# EAGLE board PCB (EAGLE 9.7.0)
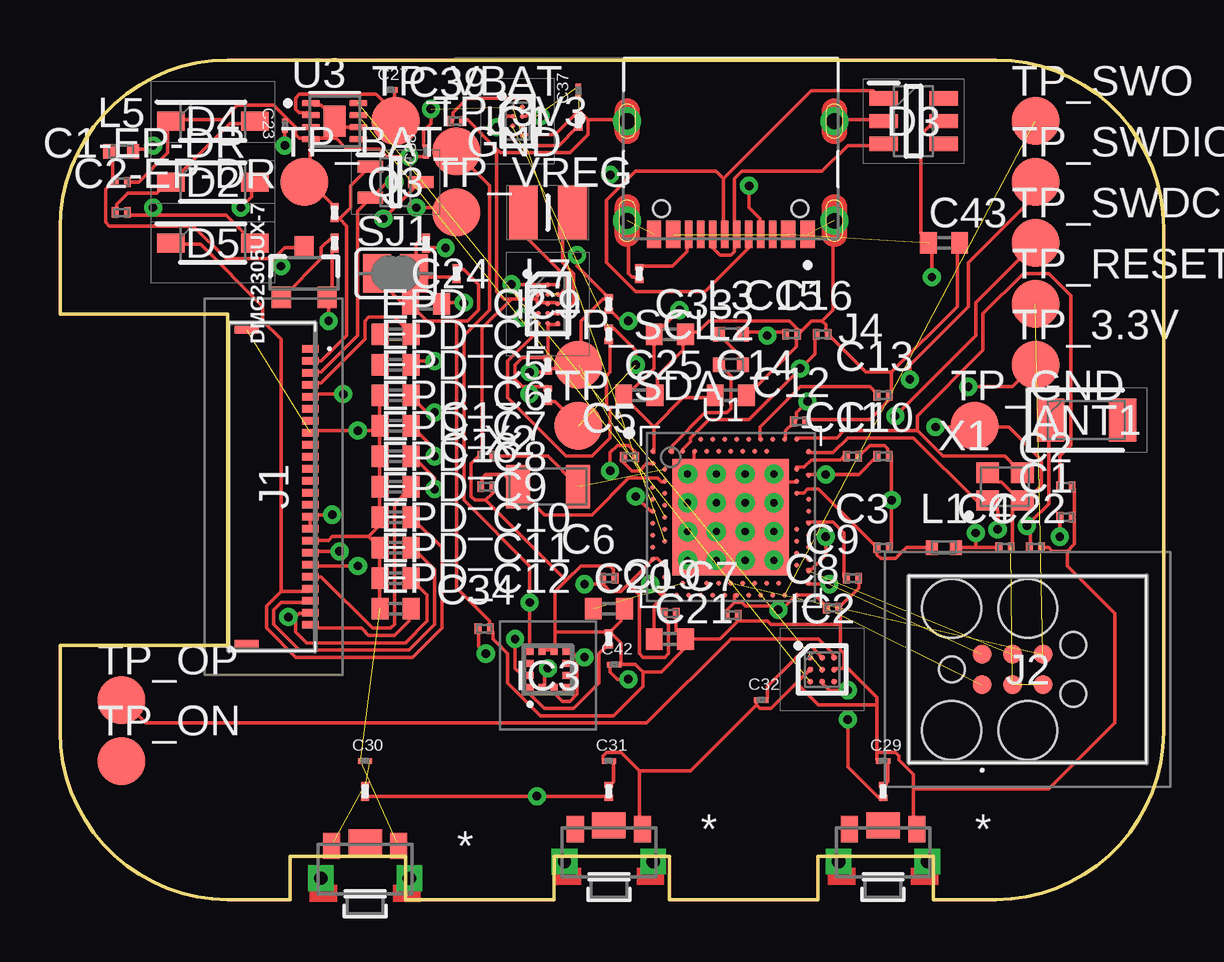
[diagram p0: board, top side]
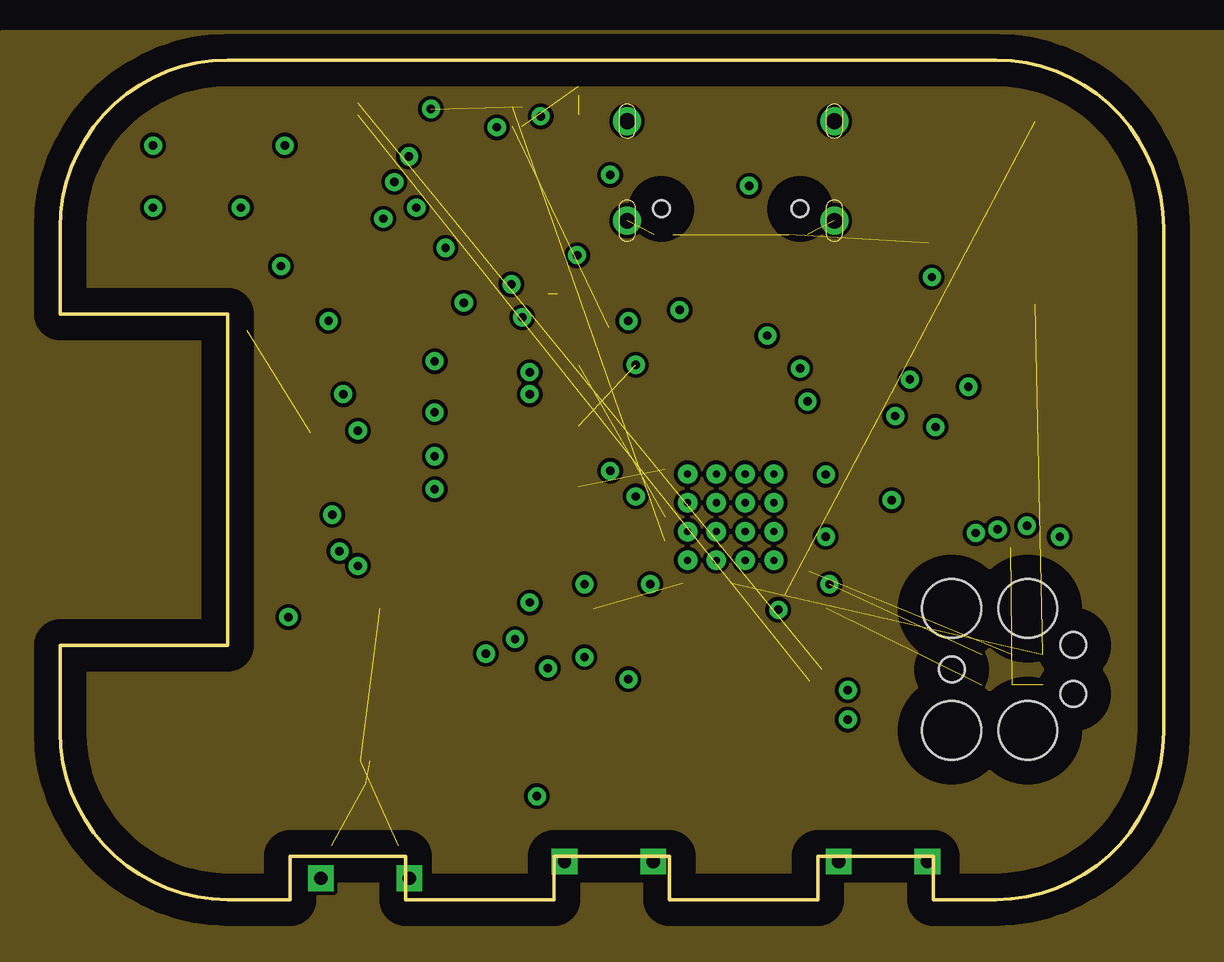
[diagram p1: board, inner layer Route2]
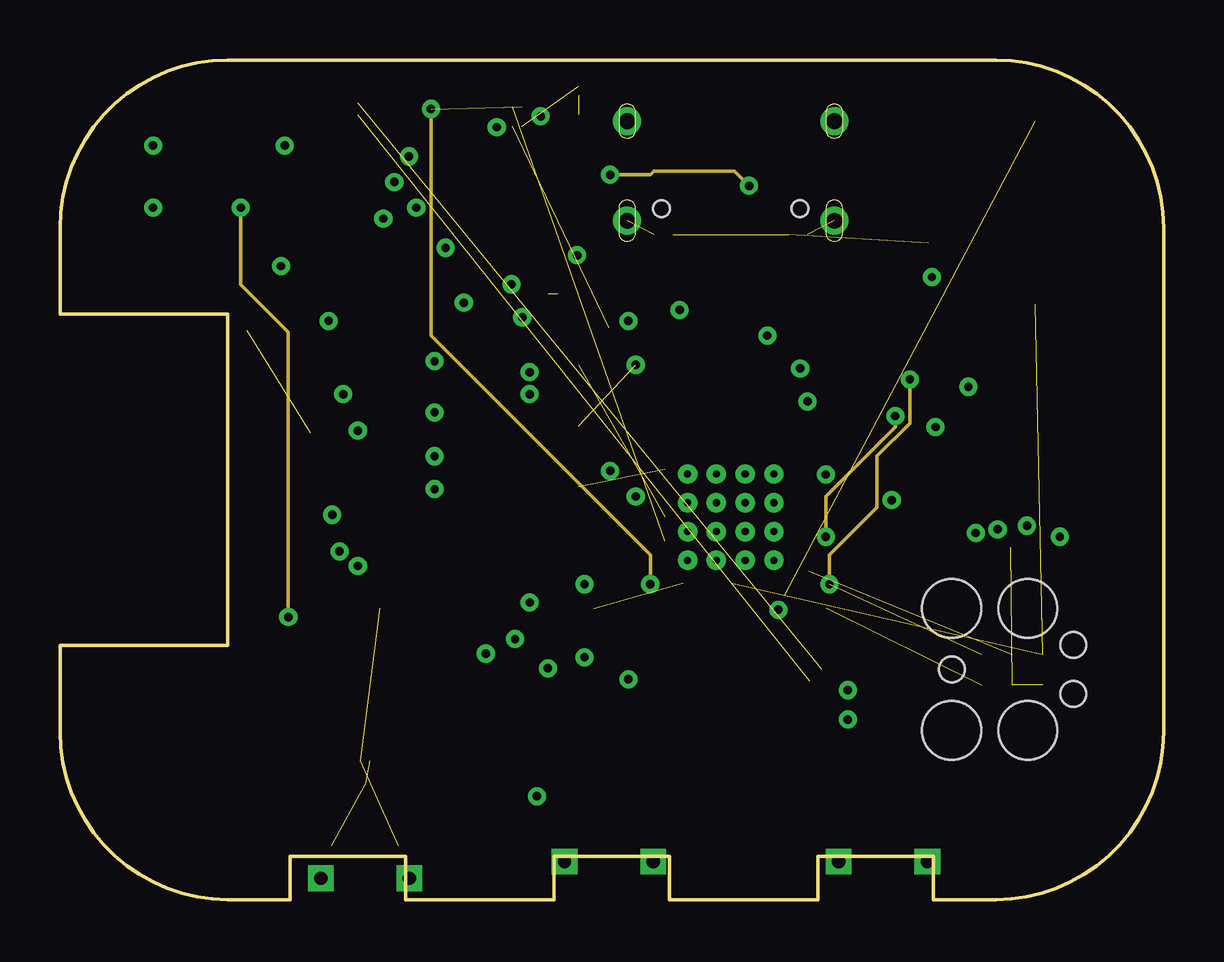
[diagram p2: board, inner layer Route15]
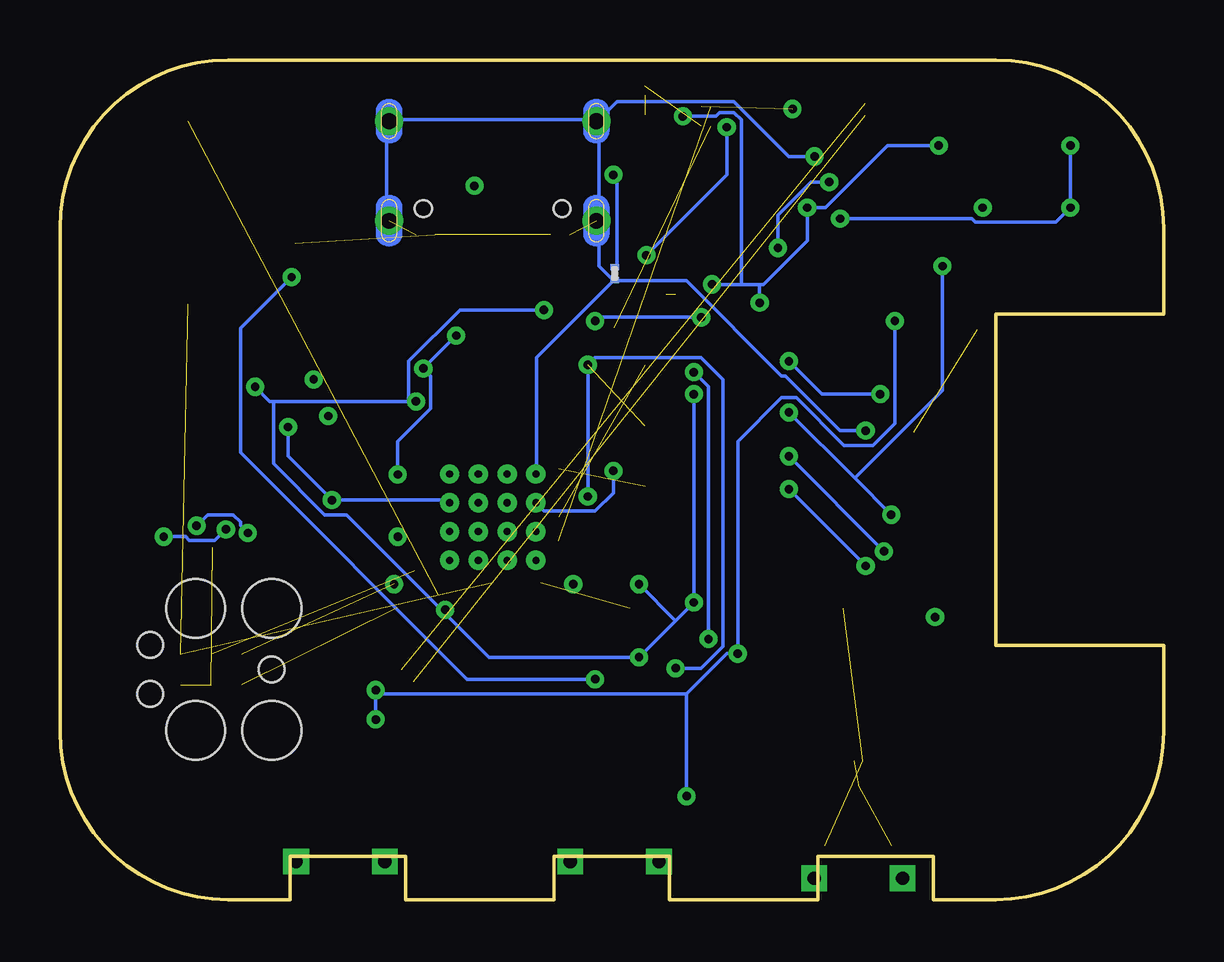
[diagram p3: board, bottom side, seen from below]

Size 46 x 35 mm. Coordinates in mm from the lower left corner, seen from the top.
Outline: 39,0 36.4,0 36.4,1.8 31.6,1.8 31.6,0 25.4,0 25.4,1.8 20.6,1.8 20.6,0 14.4,0 14.4,1.8 9.6,1.8 9.6,0 7,0 arc-90 0,7 0,10.6 7,10.6 7,24.4 0,24.4 0,28 arc-90 7,35 39,35 arc-90 46,28 46,7 arc-90 39,0
Copper layers (1+2*15+16): Top 0.035mm / dielectric 1.5mm / Route2 0.035mm / dielectric 0.15mm / Route15 0.035mm / dielectric 0.2mm / Bottom 0.035mm
Design rules "Fusion Electronics Design Rules *": minimum track width 6mil, minimum drill 0.35mm, track to track 6mil, track to pad 6mil, pad to pad 6mil, via to via 6mil, smd to smd 6mil, copper to edge 40mil, drill to drill 6mil, minimum pad ring 10mil, minimum via ring 8mil, stop-mask expansion 4mil, vias tented up to drill 9999mil, thermal gap 10mil

## Footprints (pad centres in the part's own frame; a part is rotated, then mirrored left to right if it is on the bottom)
2450AT18B100E_ANTC3216X140N = smd 1.15 x 1.8: 1 -1.5,0; 2 1.5,0
NORDIC_NRF_3_RESC0201_L = smd 0.28 x 0.43: 1 -0.255,0; 2 0.255,0
ESP32_C6_LIBRARY_1_ESP32_WROVER_EAGLE-LTSPICE_C0402 = smd 0.7 x 0.9: 1 -0.65,0; 2 0.65,0
GRM011R60J152KE01L_2_CAPC0201X13N = smd 0.22 x 0.23: 1 -0.185,0; 2 0.185,0
ESP32_C6_LIBRARY_5_SOD3716X135N = smd 1.15 x 0.8: 1 -1.75,0; 2 1.75,0
ESP32_C6_LIBRARY_3_SOT95P280X145-6N = smd 1.2 x 0.6: 1 -1.25,0.95; 2 -1.25,0; 3 -1.25,-0.95; 4 1.25,-0.95; 5 1.25,0; 6 1.25,0.95
ESP32_C6_LIBRARY_4_ESP32_C6_LIBRARY_4_ESP32_C6_LIBRARY_4_ESP32_C6_LIBRARY_4_ESP32_WROVER_SPARKFUN-DISCRETESEMI_SOT23-3 = smd 0.8 x 0.9: 1 -0.95,-1; 2 0.95,-1; 3 0,1.1
BQ25180YBGR_BGA8C40P2X4_100X155X50 = smd 0.2 x 0.2: A1 -0.2,0.6; A2 0.2,0.6; B1 -0.2,0.2; B2 0.2,0.2; C1 -0.2,-0.2; C2 0.2,-0.2; D1 -0.2,-0.6; D2 0.2,-0.6
DRV2605YZFR_BGA9C50P3X3_144X144X62 = smd 0.25 x 0.25: A1 -0.5,0.5; A2 0,0.5; A3 0.5,0.5; B1 -0.5,0; B2 0,0; B3 0.5,0; C1 -0.5,-0.5; C2 0,-0.5; C3 0.5,-0.5
BMA423_BMA423 = smd 0.3 x 0.35: 1 -0.75,-0.775; 2 -0.25,-0.775; 3 0.25,-0.775; 4 0.75,-0.775; 7 0.75,0.775; 8 0.25,0.775; 9 -0.25,0.775; 10 -0.75,0.775 | smd 0.35 x 0.3: 5 0.775,-0.25; 6 0.775,0.25; 11 -0.775,0.25; 12 -0.775,-0.25
RT6160AWSC_BGA15C40P3X5_140X230X60 = smd 0.216 x 0.216: A1 -0.4,0.8; A2 0,0.8; A3 0.4,0.8; B1 -0.4,0.4; B2 0,0.4; B3 0.4,0.4; C1 -0.4,0; C2 0,0; C3 0.4,0; D1 -0.4,-0.4; D2 0,-0.4; D3 0.4,-0.4; E1 -0.4,-0.8; E2 0,-0.8; E3 0.4,-0.8
503480-2400_5034802400 = smd 0.3 x 0.7: 1 -5.75,1.525; 2 -5.25,1.525; 3 -4.75,1.525; 4 -4.25,1.525; 5 -3.75,1.525; 6 -3.25,1.525; 7 -2.75,1.525; 8 -2.25,1.525; 9 -1.75,1.525; 10 -1.25,1.525; 11 -0.75,1.525; 12 -0.25,1.525; 13 0.25,1.525; 14 0.75,1.525; 15 1.25,1.525; 16 1.75,1.525; 17 2.25,1.525; 18 2.75,1.525; 19 3.25,1.525; 20 3.75,1.525; 21 4.25,1.525; 22 4.75,1.525; 23 5.25,1.525; 24 5.75,1.525 | smd 0.3 x 1: MP1 -6.54,-1.125; MP2 6.54,-1.125
TC2030-IDC_TC2030IDC = smd 0.783 x 0.783: 1 -0.953,-0.635; 2 -0.953,0.635; 3 0.317,-0.635; 4 0.317,0.635; 5 1.588,-0.635; 6 1.588,0.635 | hole 2.451: -2.223,-2.54; -2.223,2.54; 0.952,-2.54; 0.952,2.54 | hole 1.067: -2.223,0; 2.857,-1.016; 2.857,1.016
KH-TYPE-C-16P_KINGHELM_KH-TYPE-C-16P = smd 0.6 x 1.15: A1_B12 -3.2,4.725; A4_B9 -2.4,4.725; A9_B4 2.4,4.725; A12_B1 3.2,4.725 | smd 0.3 x 1.15: A5 -1.25,4.725; A6 -0.25,4.725; A7 0.25,4.725; A8 1.25,4.725; B5 1.75,4.725; B6 0.75,4.725; B7 -0.75,4.725; B8 -1.75,4.725 | drill 0.65 pad 1.05: SH1 -4.32,0; SH2 4.32,0; SH3 -4.32,4.15; SH4 4.32,4.15 | hole 0.7: -2.89,3.65; 2.89,3.65
NORDIC_NRF_2_RESC0402_L = smd 0.5 x 0.6: 1 -0.5,0; 2 0.5,0
MLP2016SR47MT0S1_INDC2016X100N = smd 1.2 x 2.2: 1 -1.028,0; 2 1.028,0
ESP32_C6_LIBRARY_6_SOT65P210X110-3N = smd 1.05 x 0.5: 1 -1.05,0.65; 2 -1.05,-0.65; 3 1.05,0
ERA-1AEB3401C_0201 = smd 0.35 x 0.25: 1 0,0.275; 2 0,-0.275
CPF0201D7K68C1_0201 = smd 0.35 x 0.25: 1 0,0.275; 2 0,-0.275
ESP32_C6_LIBRARY_7_JUMPER_SJ = smd 1.168 x 1.6: 1 -0.762,0; 2 0.762,0
2025-10-22_07-23-44_LIBRARY_SW_EVP-AKE31A_PAN = smd 0.711 x 1.092: 1 -1.4,-0.972; 2 1.4,-0.972 | drill 0.559 pad 0.914 square: 3 -1.848,0.381; 4 1.848,0.381 | smd 1.397 x 1.092: 5 0,-1.124
HECTOR_WATCH_1_TP20R = smd 2 x 2: TP 0,0
NORDIC_NRF_4_AQFN50P700X700X85_HS-74N = smd 4.85 x 4.85: P$74 0,0 | drill 0.3 pad 0.6: P$75 -1.8,1.8; P$76 -0.6,1.8; P$77 0.6,1.8; P$78 1.8,1.8; P$79 -1.8,0.6; P$80 -0.6,0.6; P$81 0.6,0.6; P$82 1.8,0.6; P$83 -1.8,-0.6; P$84 -0.6,-0.6; P$85 0.6,-0.6; P$86 1.8,-0.6; P$87 -1.8,-1.8; P$88 -0.6,-1.8; P$89 0.6,-1.8; P$90 1.8,-1.8 | smd 0.2 x 0.2: P$A8 -1.25,3.25; P$A10 -0.75,3.25; P$A12 -0.25,3.25; P$A14 0.25,3.25; P$A16 0.75,3.25; P$A18 1.25,3.25; P$A20 1.75,3.25; P$A22 2.25,3.25; P$A23 2.75,3.25; P$AA24 3.25,-2.25; P$AB2 -2.75,-2.5; P$AC5 -2,-2.75; P$AC9 -1,-2.75; P$AC11 -0.5,-2.75; P$AC13 0,-2.75; P$AC15 0.5,-2.75; P$AC17 1,-2.75; P$AC19 1.5,-2.75; P$AC21 2,-2.75; P$AC24 3.25,-2.75; P$AD2 -2.75,-3.25; P$AD4 -2.25,-3.25; P$AD6 -1.75,-3.25; P$AD8 -1.25,-3.25; P$AD10 -0.75,-3.25; P$AD12 -0.25,-3.25; P$AD14 0.25,-3.25; P$AD16 0.75,-3.25; P$AD18 1.25,-3.25; P$AD20 1.75,-3.25; P$AD22 2.25,-3.25; P$AD23 2.75,-3.25; P$B1 -3.25,2.75; P$B3 -2.5,2.75; P$B5 -2,2.75; P$B7 -1.5,2.75; P$B9 -1,2.75; P$B11 -0.5,2.75; P$B13 0,2.75; P$B15 0.5,2.75; P$B17 1,2.75; P$B19 1.5,2.75; P$B24 3.25,2.75; P$C1 -3.25,2.25; P$D2 -2.75,2; P$D23 2.75,2; P$E24 3.25,1.75; P$F2 -2.75,1.5; P$F23 2.75,1.5; P$G1 -3.25,1.25; P$H2 -2.75,1; P$H23 2.75,1; P$J1 -3.25,0.75; P$J24 3.25,0.75; P$K2 -2.75,0.5; P$L1 -3.25,0.25; P$L24 3.25,0.25; P$M2 -2.75,0; P$N1 -3.25,-0.25; P$N24 3.25,-0.25; P$P2 -2.75,-0.5; P$P23 2.75,-0.5; P$R1 -3.25,-0.75; P$R24 3.25,-0.75; P$T2 -2.75,-1; P$T23 2.75,-1; P$U1 -3.25,-1.25; P$U24 3.25,-1.25; P$V23 2.75,-1.5; P$W1 -3.25,-1.75; P$W24 3.25,-1.75; P$Y2 -2.75,-2; P$Y23 2.75,-2
ESP32_C6_LIBRARY_SON50P200X200X80-9N = smd 0.76 x 0.27: 1 -0.985,0.75; 2 -0.985,0.25; 3 -0.985,-0.25; 4 -0.985,-0.75; 5 0.985,-0.75; 6 0.985,-0.25; 7 0.985,0.25; 8 0.985,0.75 | smd 0.9 x 1.3: 9 0,0
NORDIC_NRF_BT-XTAL_2016_N = smd 0.95 x 0.85: 1 -0.725,-0.575; 2 0.725,-0.575; 3 0.725,0.575; 4 -0.725,0.575
NORDIC_NRF_1_XTAL_3215_N = smd 1 x 1.8: 1 -1.25,0; 2 1.25,0

## Placement (x,y rotation side)
ANT1  2450AT18B100E  [2450AT18B100E_ANTC3216X140N]  42.79,19.99 0 top
C1  12pF  [NORDIC_NRF_3_RESC0201_L]  41.93,15.94 0 top
C1-EP-DR  10uF  [NORDIC_NRF_3_RESC0201_L]  2.56,29.91 0 top
C2  12pF  [NORDIC_NRF_3_RESC0201_L]  41.93,17.21 0 top
C2-EP-DR  4.7uF/25V  [NORDIC_NRF_3_RESC0201_L]  2.56,28.64 0 top
C3  1pF  [NORDIC_NRF_3_RESC0201_L]  34.31,14.67 0 top
C4  1pF  [NORDIC_NRF_3_RESC0201_L]  39.39,14.67 0 top
C5  100nF  [NORDIC_NRF_3_RESC0201_L]  23.75,18.45 0 top
C6  4.7µF  [NORDIC_NRF_3_RESC0201_L]  22.88,13.4 0 top
C7  100nF  [NORDIC_NRF_3_RESC0201_L]  28.02,11.85 0 top
C8  100nF  [NORDIC_NRF_3_RESC0201_L]  32.2,12.15 0 top
C9  820pF  [NORDIC_NRF_3_RESC0201_L]  33.04,13.4 0 top
C10  N.C.  [NORDIC_NRF_3_RESC0201_L]  34.31,18.48 0 top
C11  100pF  [NORDIC_NRF_3_RESC0201_L]  33.04,18.48 0 top
C12  100nF  [NORDIC_NRF_3_RESC0201_L]  30.83,19.93 0 top
C13  N.C.  [NORDIC_NRF_3_RESC0201_L]  34.31,21.02 0 top
C14  4.7µF  [ESP32_C6_LIBRARY_1_ESP32_WROVER_EAGLE-LTSPICE_C0402]  27.96,21.02 0 top
C15  1.0µF  [NORDIC_NRF_3_RESC0201_L]  30.5,23.56 0 top
C16  47nF  [NORDIC_NRF_3_RESC0201_L]  31.77,23.56 0 top
C17  12pF  [NORDIC_NRF_3_RESC0201_L]  17.8,18.48 0 top
C18  12pF  [NORDIC_NRF_3_RESC0201_L]  17.8,17.21 0 top
C19  100nF  [NORDIC_NRF_3_RESC0201_L]  25.43,11.93 0 top
C20  4.7µF  [ESP32_C6_LIBRARY_1_ESP32_WROVER_EAGLE-LTSPICE_C0402]  22.88,12.13 0 top
C21  4.7µF  [ESP32_C6_LIBRARY_1_ESP32_WROVER_EAGLE-LTSPICE_C0402]  25.42,10.86 0 top
C22  N.C.  [NORDIC_NRF_3_RESC0201_L]  40.66,14.67 0 top
C23  0.1uF  [GRM011R60J152KE01L_2_CAPC0201X13N]  9.37,32.27 90.7 top
C24  10uF  [ESP32_C6_LIBRARY_1_ESP32_WROVER_EAGLE-LTSPICE_C0402]  15.26,24.83 0 top
C25  22uF  [ESP32_C6_LIBRARY_1_ESP32_WROVER_EAGLE-LTSPICE_C0402]  24.15,21.02 0 top
C27  0.1uF  [GRM011R60J152KE01L_2_CAPC0201X13N]  13.78,33.75 0 top
C29  1uF  [GRM011R60J152KE01L_2_CAPC0201X13N]  34.31,5.78 0 top
C30  1uF  [GRM011R60J152KE01L_2_CAPC0201X13N]  12.72,5.78 0 top
C31  1uF  [GRM011R60J152KE01L_2_CAPC0201X13N]  22.88,5.78 0 top
C32  1uF  [GRM011R60J152KE01L_2_CAPC0201X13N]  29.23,8.32 0 top
C33  22uF  [ESP32_C6_LIBRARY_1_ESP32_WROVER_EAGLE-LTSPICE_C0402]  25.42,23.56 0 top
C34  0.1uF  [NORDIC_NRF_3_RESC0201_L]  17.69,11.29 0 top
C37  1uF  [GRM011R60J152KE01L_2_CAPC0201X13N]  21.61,33.72 90 top
C38  1uF  [GRM011R60J152KE01L_2_CAPC0201X13N]  15.26,31.18 90 top
C39  10uF  [NORDIC_NRF_3_RESC0201_L]  16.53,32.45 0 top
C42  0.1uF  [GRM011R60J152KE01L_2_CAPC0201X13N]  23.1,9.8 0 top
C43  4.7uF  [ESP32_C6_LIBRARY_1_ESP32_WROVER_EAGLE-LTSPICE_C0402]  36.85,27.37 0 top
D2  ESP32_C6_LIBRARY_5_MBR0530  [ESP32_C6_LIBRARY_5_SOD3716X135N]  6.37,29.91 0 top
D3  USBLC6-2SC6Y  [ESP32_C6_LIBRARY_3_SOT95P280X145-6N]  35.58,32.45 0 top
D4  ESP32_C6_LIBRARY_5_MBR0530  [ESP32_C6_LIBRARY_5_SOD3716X135N]  6.37,32.45 0 top
D5  ESP32_C6_LIBRARY_5_MBR0530  [ESP32_C6_LIBRARY_5_SOD3716X135N]  6.37,27.37 0 top
DMG2305UX-7  20V/4.2A/52mΩ/1.4W  [ESP32_C6_LIBRARY_4_ESP32_C6_LIBRARY_4_ESP32_C6_LIBRARY_4_ESP32_C6_LIBRARY_4_ESP32_WROVER_SPARKFUN-DISCRETESEMI_SOT23-3]  10.18,26.1 0 top
EPD_C1  1uF/50V  [ESP32_C6_LIBRARY_1_ESP32_WROVER_EAGLE-LTSPICE_C0402]  13.99,22.29 0 top
EPD_C2  1uF/50V  [ESP32_C6_LIBRARY_1_ESP32_WROVER_EAGLE-LTSPICE_C0402]  13.99,23.56 0 top
EPD_C5  0.1uF/50V  [ESP32_C6_LIBRARY_1_ESP32_WROVER_EAGLE-LTSPICE_C0402]  13.99,21.02 0 top
EPD_C6  1uF/50V  [ESP32_C6_LIBRARY_1_ESP32_WROVER_EAGLE-LTSPICE_C0402]  13.99,19.75 0 top
EPD_C7  1uF/50V  [ESP32_C6_LIBRARY_1_ESP32_WROVER_EAGLE-LTSPICE_C0402]  13.99,18.48 0 top
EPD_C8  1uF/50V  [ESP32_C6_LIBRARY_1_ESP32_WROVER_EAGLE-LTSPICE_C0402]  13.99,17.21 0 top
EPD_C9  1uF/50V  [ESP32_C6_LIBRARY_1_ESP32_WROVER_EAGLE-LTSPICE_C0402]  13.99,15.94 0 top
EPD_C10  1uF/50V  [ESP32_C6_LIBRARY_1_ESP32_WROVER_EAGLE-LTSPICE_C0402]  13.99,14.67 0 top
EPD_C11  1uF/50V  [ESP32_C6_LIBRARY_1_ESP32_WROVER_EAGLE-LTSPICE_C0402]  13.99,13.4 0 top
EPD_C12  1uF/50V  [ESP32_C6_LIBRARY_1_ESP32_WROVER_EAGLE-LTSPICE_C0402]  13.99,12.13 0 top
IC1  BQ25180YBGR  [BQ25180YBGR_BGA8C40P2X4_100X155X50]  19.07,32.45 0 top
IC2  DRV2605YZFR  [DRV2605YZFR_BGA9C50P3X3_144X144X62]  31.77,9.59 0 top
IC3  BMA421  [BMA423_BMA423]  20.34,9.59 0 top
IC9  RT6160AWSC  [RT6160AWSC_BGA15C40P3X5_140X230X60]  20.34,24.83 0 top
J1  503480-2400  [503480-2400_5034802400]  8.91,17.21 270 top
J2  TC2030-IDC  [TC2030-IDC_TC2030IDC]  39.39,9.59 0 top
J4  KH-TYPE-C-16P  [KH-TYPE-C-16P_KINGHELM_KH-TYPE-C-16P]  27.96,32.45 180 top
L1  3.9nH  [NORDIC_NRF_2_RESC0402_L]  36.85,14.67 0 top
L2  10µH  [NORDIC_NRF_2_RESC0402_L]  27.96,22.29 0 top
L3  15nH  [NORDIC_NRF_2_RESC0402_L]  27.96,23.56 0 top
L5  68uH  [NORDIC_NRF_2_RESC0402_L]  2.56,31.18 0 top
L7  FTC252012SR47MBCA  [MLP2016SR47MT0S1_INDC2016X100N]  20.34,28.64 0 top
Q3  SI1308EDL-T1-GE3  [ESP32_C6_LIBRARY_6_SOT65P210X110-3N]  13.99,29.91 0 top
R1_EP_DR  0.47  [ERA-1AEB3401C_0201]  15.26,27.37 0 top
R1_USB  5K1  [CPF0201D7K68C1_0201]  22.88,26.1 180 bottom
R2  0  [CPF0201D7K68C1_0201]  22.88,23.56 0 top
R2_EP_DR  10K  [ERA-1AEB3401C_0201]  11.45,28.64 0 top
R2_USB  5K1  [ERA-1AEB3401C_0201]  24.15,26.1 0 top
R3  0  [ERA-1AEB3401C_0201]  22.88,10.86 0 top
R4  0  [CPF0201D7K68C1_0201]  22.88,24.83 0 top
R5  10k  [CPF0201D7K68C1_0201]  12.72,4.51 0 top
R7  10k  [CPF0201D7K68C1_0201]  34.31,4.51 0 top
R8  10k  [CPF0201D7K68C1_0201]  22.88,4.51 0 top
R9  10K  [ERA-1AEB3401C_0201]  21.61,32.45 0 top
R17  3K3  [CPF0201D7K68C1_0201]  20.34,22.29 0 top
R18  3K3  [CPF0201D7K68C1_0201]  20.34,21.02 0 top
R_PWR_EPD  10K  [CPF0201D7K68C1_0201]  11.45,27.37 0 top
R_TYPE_SEL  2.2  [ERA-1AEB3401C_0201]  16.53,26.1 0 top
SJ1  [ESP32_C6_LIBRARY_7_JUMPER_SJ]  13.99,26.1 0 top
SW_DN  2025-10-22_07-23-44_LIBRARY_EVP-AKE31ASW_EVP-AKE31A_PAN  [2025-10-22_07-23-44_LIBRARY_SW_EVP-AKE31A_PAN]  34.31,1.97 180 top
SW_ENT  2025-10-22_07-23-44_LIBRARY_EVP-AKE31ASW_EVP-AKE31A_PAN  [2025-10-22_07-23-44_LIBRARY_SW_EVP-AKE31A_PAN]  22.88,1.97 180 top
SW_UP  2025-10-22_07-23-44_LIBRARY_EVP-AKE31ASW_EVP-AKE31A_PAN  [2025-10-22_07-23-44_LIBRARY_SW_EVP-AKE31A_PAN]  12.72,1.27 180 top
TP_3.3V  HECTOR_WATCH_1_TPTP20R  [HECTOR_WATCH_1_TP20R]  40.66,22.29 0 top
TP_3V3  HECTOR_WATCH_1_TPTP20R  [HECTOR_WATCH_1_TP20R]  16.53,31.18 0 top
TP_BAT_GND  HECTOR_WATCH_1_TPTP20R  [HECTOR_WATCH_1_TP20R]  10.18,29.91 0 top
TP_GND  HECTOR_WATCH_1_TPTP20R  [HECTOR_WATCH_1_TP20R]  38.12,19.75 0 top
TP_ON  HECTOR_WATCH_1_TPTP20R  [HECTOR_WATCH_1_TP20R]  2.56,5.78 0 top
TP_OP  HECTOR_WATCH_1_TPTP20R  [HECTOR_WATCH_1_TP20R]  2.56,8.32 0 top
TP_RESET  HECTOR_WATCH_1_TPTP20R  [HECTOR_WATCH_1_TP20R]  40.66,24.83 0 top
TP_SCL  HECTOR_WATCH_1_TPTP20R  [HECTOR_WATCH_1_TP20R]  21.61,22.29 0 top
TP_SDA  HECTOR_WATCH_1_TPTP20R  [HECTOR_WATCH_1_TP20R]  21.61,19.75 0 top
TP_SWDCLK  HECTOR_WATCH_1_TPTP20R  [HECTOR_WATCH_1_TP20R]  40.66,27.37 0 top
TP_SWDIO  HECTOR_WATCH_1_TPTP20R  [HECTOR_WATCH_1_TP20R]  40.66,29.91 0 top
TP_SWO  HECTOR_WATCH_1_TPTP20R  [HECTOR_WATCH_1_TP20R]  40.66,32.45 0 top
TP_VBAT  HECTOR_WATCH_1_TPTP20R  [HECTOR_WATCH_1_TP20R]  13.99,32.45 0 top
TP_VREG  HECTOR_WATCH_1_TPTP20R  [HECTOR_WATCH_1_TP20R]  16.53,28.64 0 top
U1  NRF52840_QF  [NORDIC_NRF_4_AQFN50P700X700X85_HS-74N]  27.96,15.94 0 top
U3  MAX17048G+T10  [ESP32_C6_LIBRARY_SON50P200X200X80-9N]  11.45,32.45 0 top
X1  32MHz  [NORDIC_NRF_BT-XTAL_2016_N]  39.39,17.21 0 top
X2  32.768kHz  [NORDIC_NRF_1_XTAL_3215_N]  20.34,17.21 0 top

## Library data of the parts
ANT1 = InkTime_v5 (1); ARROW_PART_NUMBER: 2450AT18B100E; ARROW_PRICE-STOCK: https://www.arrow.com/en/products/2450at18b100e/johanson-dielectrics?utm_currency=USD&region=nac; DESCRIPTION: Antennas 2.45GHz ANTENNA; HEIGHT: 1.4mm; MANUFACTURER_NAME: JOHANSON TECHNOLOGY; MANUFACTURER_PART_NUMBER: 2450AT18B100E; MOUSER_PART_NUMBER: 609-2450AT18B100E; MOUSER_PRICE-STOCK: https://www.mouser.co.uk/ProductDetail/Johanson-Technology/2450AT18B100E?qs=yCnrNFeXz%252Bh5MFsFIXGZGA%3D%3D
C1 C1-EP-DR C2 C2-EP-DR C3-C13 C15-C19 C22 C34 C39 L1-L3 L5 R1_EP_DR R1_USB R2 R2_EP_DR R2_USB R3-R5 R7-R9 R17 R18 R_PWR_EPD R_TYPE_SEL SJ1 TP_3.3V TP_3V3 TP_BAT_GND TP_GND TP_ON TP_OP TP_RESET TP_SCL TP_SDA TP_SWDCLK TP_SWDIO TP_SWO TP_VBAT TP_VREG U1 X1 X2 = InkTime_v5 (1)
C14 C20 C21 C24 C25 C33 C43 EPD_C1 EPD_C2 EPD_C5-EPD_C12 = InkTime_v5 (1); SPICEMODEL: NONE; SPICEPREFIX: C
C23 C27 C29-C32 C37 C38 C42 = InkTime_v5 (1); AVAILABILITY: In Stock; CHECK_PRICES: https://www.snapeda.com/parts/GRM011R60J152KE01L/Murata/view-part/?ref=eda; DESCRIPTION: SMD Capacitor X5R(EIA) with Capacitance: 1500pF Tol. 10%. Rated Voltage: 6.3Vdc; MF: Murata; MP: GRM011R60J152KE01L; PACKAGE: 0201 Murata; PRICE: None; SNAPEDA_LINK: https://www.snapeda.com/parts/GRM011R60J152KE01L/Murata/view-part/?ref=snap
D2 D4 D5 = InkTime_v5 (1); AVAILABILITY: In Stock; CHECK_PRICES: https://www.snapeda.com/parts/MBR0530/Onsemi/view-part/?ref=eda; DESCRIPTION: Diode Schottky 30 V 500mA Surface Mount SOD-123; MF: ON Semiconductor; MP: MBR0530; PACKAGE: SOD-123-2 ON Semiconductor; PRICE: None; PURCHASE-URL: https://www.snapeda.com/api/url_track_click_mouser/?unipart_id=179458&manufacturer=ON Semiconductor&part_name=MBR0530&search_term=None; SNAPEDA_LINK: https://www.snapeda.com/parts/MBR0530/Onsemi/view-part/?ref=snap
D3 = InkTime_v5 (1); AVAILABILITY: In Stock; CHECK_PRICES: https://www.snapeda.com/parts/USBLC6-2SC6Y/STMicroelectronics/view-part/?ref=eda; DESCRIPTION: 17V Clamp 5A (8/20µs) Ipp Tvs Diode Surface Mount SOT-23-6; MF: STMicroelectronics; MP: USBLC6-2SC6Y; PACKAGE: SOT-23-6 STMicroelectronics; PRICE: None; SNAPEDA_LINK: https://www.snapeda.com/parts/USBLC6-2SC6Y/STMicroelectronics/view-part/?ref=snap
DMG2305UX-7 = InkTime_v5 (1); PROD_ID: TRAN-14388
IC1 = InkTime_v5 (1); ARROW_PART_NUMBER: BQ25180YBGR; ARROW_PRICE-STOCK: https://www.arrow.com/en/products/bq25180ybgr/texas-instruments?utm_currency=USD&region=nac; DESCRIPTION: Charger IC Lithium Ion/Polymer, Lithium Iron Phosphate 8-DSBGA (1.6x1.1); HEIGHT: 0.5mm; MANUFACTURER_NAME: Texas Instruments; MANUFACTURER_PART_NUMBER: BQ25180YBGR; MOUSER_PART_NUMBER: 595-BQ25180YBGR; MOUSER_PRICE-STOCK: https://www.mouser.co.uk/ProductDetail/Texas-Instruments/BQ25180YBGR?qs=doiCPypUmgEWjAK%252BJAX6Tw%3D%3D
IC2 = InkTime_v5 (1); ARROW_PART_NUMBER: DRV2605YZFR; ARROW_PRICE-STOCK: https://www.arrow.com/en/products/drv2605yzfr/texas-instruments?region=nac; DESCRIPTION: Haptic Driver for ERM/LRA with Built-In Library and Smart Loop Architecture; HEIGHT: 0.625mm; MANUFACTURER_NAME: Texas Instruments; MANUFACTURER_PART_NUMBER: DRV2605YZFR
IC3 = InkTime_v5 (1); ARROW_PART_NUMBER: BMA423; ARROW_PRICE-STOCK: https://www.arrow.com/en/products/bma423/bosch; DESCRIPTION: Accelerometers Triaxial low-g 12bit Acceleration Sensor; HEIGHT: 1mm; MANUFACTURER_NAME: BOSCH; MANUFACTURER_PART_NUMBER: BMA423; MOUSER_PART_NUMBER: 262-BMA423; MOUSER_PRICE-STOCK: https://www.mouser.co.uk/ProductDetail/Bosch-Sensortec/BMA423?qs=HXFqYaX1Q2xC%252BSgeGoX3mg%3D%3D
IC9 = InkTime_v5 (1); DESCRIPTION: Buck-Boost Regulator Positive Output Step-Up/Step-Down I2C DC-DC Controller IC 15-WL-CSP (BSC) (1.4x2.3); HEIGHT: 0.6mm; MANUFACTURER_NAME: RICHTEK; MANUFACTURER_PART_NUMBER: RT6160AWSC; MOUSER_PART_NUMBER: 835-RT6160AWSC; MOUSER_PRICE-STOCK: https://www.mouser.co.uk/ProductDetail/Richtek/RT6160AWSC?qs=amGC7iS6iy%2FLd9PSoixZXQ%3D%3D
J1 = InkTime_v5 (1); DESCRIPTION: FFC & FPC Connectors 0.5mm FPC RA SMT Dual Contact 24Ckt; HEIGHT: 1.87mm; MANUFACTURER_NAME: Molex; MANUFACTURER_PART_NUMBER: 503480-2400; MOUSER_PART_NUMBER: 538-503480-2400; MOUSER_PRICE-STOCK: https://www.mouser.co.uk/ProductDetail/Molex/503480-2400?qs=OAhjpuo3Vu7efIoxFh9AOw%3D%3D
J2 = InkTime_v5 (1); DESCRIPTION: CABLE ADAPTER 6 POS; HEIGHT: 19mm; MANUFACTURER_NAME: Tag Connect; MANUFACTURER_PART_NUMBER: TC2030-IDC
J4 = InkTime_v5 (1); AVAILABILITY: Not in stock; CHECK_PRICES: https://www.snapeda.com/parts/KH-TYPE-C-16P/Kinghelm/view-part/?ref=eda; MF: kinghelm; MP: KH-TYPE-C-16P; PACKAGE: None; PRICE: None; SNAPEDA_LINK: https://www.snapeda.com/parts/KH-TYPE-C-16P/Kinghelm/view-part/?ref=snap
L7 = InkTime_v5 (1); DESCRIPTION: SMD / SMT Inductors (Coils), L=0.47?H, L x W x T :; HEIGHT: 1mm; JLCPCB: https://jlcpcb.com/partdetail/6763488-FTC252012SR47MBCA/C5832368; MANUFACTURER_NAME: TDK; MANUFACTURER_PART_NUMBER: FTC252012SR47MBCA
Q3 = InkTime_v5 (1); AVAILABILITY: In Stock; CHECK_PRICES: https://www.snapeda.com/parts/SI1308EDL-T1-GE3/Vishay+Siliconix/view-part/?ref=eda; DESCRIPTION: Si1308EDL-T1-GE3 N-channel MOSFET Transistor, 1.5 A, 30 V, 3-Pin SC-70 | Siliconix / Vishay SI1308EDL-T1-GE3; MF: Vishay Siliconix; MP: SI1308EDL-T1-GE3; PACKAGE: SOT-323 Vishay Semiconductor; PRICE: None; PURCHASE-URL: https://www.snapeda.com/api/url_track_click_mouser/?unipart_id=274603&manufacturer=Vishay Siliconix&part_name=SI1308EDL-T1-GE3&search_term=None; SNAPEDA_LINK: https://www.snapeda.com/parts/SI1308EDL-T1-GE3/Vishay+Siliconix/view-part/?ref=snap
SW_DN SW_ENT SW_UP = InkTime_v5 (1); COPYRIGHT: Copyright (C) 2025 Ultra Librarian. All rights reserved.; DIGI-KEY_PART_NUMBER_1: P123437TR-ND; DIGI-KEY_PART_NUMBER_2: P123437CT-ND; DIGI-KEY_PART_NUMBER_3: P123437DKR-ND; MANUFACTURER_NAME: Panasonic; MANUFACTURER_PART_NUMBER: EVP-AKE31A
U3 = InkTime_v5 (1); AVAILABILITY: In Stock; CHECK_PRICES: https://www.snapeda.com/parts/MAX17048G+T10/Analog+Devices/view-part/?ref=eda; DESCRIPTION: 3µA 1-Cell/2-Cell Fuel Gauge with ModelGauge; MF: Analog Devices; MP: MAX17048G+T10; PACKAGE: TDFN-8 Maxim; PRICE: None; PURCHASE-URL: https://www.snapeda.com/api/url_track_click_mouser/?unipart_id=329239&manufacturer=Analog Devices&part_name=MAX17048G+T10&search_term=None; SNAPEDA_LINK: https://www.snapeda.com/parts/MAX17048G+T10/Analog+Devices/view-part/?ref=snap

## Nets
3V3/1.7D: C34.1 DMG2305UX-7.2 IC2.C2 R5.2 R7.2 R8.2 R_PWR_EPD.2
3V3/2.4A: C6.1 C7.1 C8.1 C12.1 C14.1 C19.1 C25.1 C33.1 IC3.3 IC3.7 IC3.10 IC9.E2 IC9.E3 J2.1 R17.1 R18.1 TP_3.3V.TP TP_3V3.TP U1.P$A22 U1.P$AD14 U1.P$AD23 U1.P$B1 U1.P$W1 U1.P$Y2
ALERT/1.6C: U3.5
ALERT/2.5C: U1.P$J24
D+/1.5D: D3.4
D+/2.7D: U1.P$AD6
D-/1.5D: D3.6
D-/2.7D: U1.P$AD4
DN: D3.1 J4.A7 J4.B7
DP: D3.3 J4.A6 J4.B6
EPD_3V3: C1-EP-DR.1 DMG2305UX-7.3 EPD_C5.2 J1.15 J1.16 L5.1
EPD_BUSY/1.5D: J1.9
EPD_BUSY/2.2D: U1.P$AD12
EPD_CS/1.4C: J1.12
EPD_CS/2.2D: U1.P$K2
EPD_DC/1.5D: J1.11
EPD_DC/2.2D: U1.P$AD10
EPD_RST/1.5D: J1.10
EPD_RST/2.2D: U1.P$AC11
GDR: J1.2 Q3.1 R2_EP_DR.2
GND: C1-EP-DR.2 C1.2 C2.2 C3.2 C4.2 C5.2 C6.2 C7.2 C8.2 C9.2 C10.2 C11.2 C12.2 C13.2 C14.2 C15.2 C16.2 C17.1 C18.2 C19.2 C20.2 C21.2 C22.2 C23.2 C24.1 C25.2 C29.1 C30.1 C31.1 C32.1 C33.2 C34.2 C37.1 C38.1 C39.2 C42.2 C43.2 D3.2 D4.1 EPD_C5.1 EPD_C6.1 EPD_C7.1 EPD_C8.1 EPD_C9.1 EPD_C10.1 EPD_C11.1 EPD_C12.1 IC1.D2 IC2.B1 IC2.B3 IC3.8 IC3.9 IC9.B1 IC9.C1 IC9.C2 IC9.C3 J1.8 J1.17 J1.MP1 J2.3 J2.5 J4.A1_B12 J4.A12_B1 J4.SH1 J4.SH2 J4.SH3 J4.SH4 R1_USB.1 R2_EP_DR.1 R2_USB.2 R3.1 R9.1 R_TYPE_SEL.1 SJ1.1 SW_DN.1 SW_ENT.1 SW_UP.1 TP_BAT_GND.TP TP_GND.TP U1.P$74 U1.P$75 U1.P$76 U1.P$77 U1.P$78 U1.P$79 U1.P$80 U1.P$81 U1.P$82 U1.P$83 U1.P$84 U1.P$85 U1.P$86 U1.P$87 U1.P$88 U1.P$89 U1.P$90 U1.P$B7 U1.P$F23 U3.1 U3.4 U3.6 U3.9 X1.2 X1.4
HAPTIC_EN/1.4C: IC2.A1
HAPTIC_EN/2.6A: U1.P$U1
IMU_INT1: U1.P$N1
IMU_INT2: U1.P$P2
JJ: C10.1 C15.1 C16.1 L3.2 U1.P$B5 U1.P$E24
LX1: IC9.B2 IC9.B3 L7.1
LX2: IC9.D2 IC9.D3 L7.2
MOSI/1.5B: J1.14
MOSI/2.2D: U1.P$B13
MU_INT1: IC3.5
MU_INT2: IC3.6
N$1: IC1.D1 R9.2
N$2: IC9.D1 R4.2
N$3: IC9.E1 R2.2
N$4: IC3.1 R3.2
N$5: C20.1 U1.P$AC5
N$6: C18.1 U1.P$F2 X2.1
N$7: C17.2 U1.P$D2 X2.2
N$8: C5.1 U1.P$C1
N$9: C9.1 U1.P$N24
N$10: L2.1 U1.P$B3
N$11: L2.2 L3.1
N$12: C3.1 L1.1 U1.P$H23
N$13: ANT1.1 C4.1 C22.1 L1.2
N$14: C11.1 U1.P$D23
N$15: C2.1 U1.P$A23 X1.3
N$16: C1.1 U1.P$B24 X1.1
N$17: C2-EP-DR.2 D5.2 L5.2 Q3.3
N$18: C2-EP-DR.1 D2.1 D4.2
N$20: R1_EP_DR.1 R_TYPE_SEL.2 SJ1.2
N$21: J1.MP2
N$22: C13.1 U1.P$A18
N$23: C32.2 IC2.A2
N$24: EPD_C2.2 J1.4
N$25: EPD_C1.2 J1.5
N$26: EPD_C2.1
N$27: EPD_C1.1
N$28: EPD_C6.2 J1.18
N$29: EPD_C7.2 J1.19
N$30: EPD_C8.2 J1.20
N$31: J4.A5 R1_USB.2
N$32: EPD_C10.2 J1.22
N$33: C31.2 R8.1
N$34: EPD_C12.2 J1.24
N$35: J4.B5 R2_USB.1
N$36: C29.2 R7.1
OUT: IC2.C3
OUT+: IC2.A3 TP_OP.TP
OUT-: TP_ON.TP
P0.04: U1.P$J1
P0.09: U1.P$L24
P0.13/1.5D: C30.2 R5.1 SW_UP.2
P0.13/2.6C: U1.P$AD8
P0.14/1.5D: SW_ENT.2
P0.14/2.7C: U1.P$AC9
P0.19: U1.P$AC15
P0.20: U1.P$AD16
P0.21: U1.P$AC17
P0.22: U1.P$AD18
P0.23: U1.P$AC19
P0.24: U1.P$AD20
P0.25: U1.P$AC21
P0.26: U1.P$G1
P0.27: U1.P$H2
P0.28: U1.P$B11
P0.29: U1.P$A10
P0.30: U1.P$B9
P0.31: U1.P$A8
P1.01/1.6C: DMG2305UX-7.1 R_PWR_EPD.1
P1.01/2.4B: U1.P$Y23
P1.02/1.6C: SW_DN.2
P1.02/2.8C: U1.P$W24
P1.03: U1.P$V23
P1.04: U1.P$U24
P1.05: U1.P$T23
P1.06: U1.P$R24
P1.07: U1.P$P23
P1.09: U1.P$R1
P1.10: U1.P$A20
P1.11: U1.P$B19
P1.12: U1.P$B17
P1.13: U1.P$A16
P1.14: U1.P$B15
P1.15: U1.P$A14
PMIC_INT: IC1.A1 U1.P$T2
PREVGH: D5.1 EPD_C9.2 J1.21
PREVGL: D2.2 EPD_C11.2 J1.23
RESE: J1.3 Q3.2 R1_EP_DR.2
RESET: J2.6 TP_RESET.TP U1.P$AC13
SCK/1.5B: J1.13
SCK/2.2D: U1.P$A12
SCL/1.4C: IC2.C1 U3.7
SCL/2.4C: IC1.B1 IC3.12 R4.1 R17.2 TP_SCL.TP U1.P$M2
SDA/1.4C: IC2.B2 U3.8
SDA/2.4C: IC1.C1 IC3.2 R2.1 R18.2 TP_SDA.TP U1.P$L1
SWDCLK: J2.4 TP_SWDCLK.TP U1.P$AA24
SWDIO: J2.2 TP_SWDIO.TP U1.P$AC24
SWO: TP_SWO.TP U1.P$AD22
VBAT/1.2A: C27.2 TP_VBAT.TP U3.2 U3.3
VBAT/2.5C: C37.2 IC1.C2
VBUS/1.5D: C42.1 C43.1 D3.5 J4.A4_B9 J4.A9_B4
VBUS/2.6D: C21.1 C38.2 IC1.A2 U1.P$AD2
VREG: C23.1 C24.2 C39.1 IC1.B2 IC9.A1 IC9.A2 IC9.A3 TP_VREG.TP

## Tracks (layer width: path | path; a pad name or v marks a point on that pad's centre or on a via)
3V3/1.7D  (via drill 0.35)
  Top 0.152: R5.2 12.72,4.31 v19.88,4.31 22.78,4.31 R8.2 | R_PWR_EPD.2 11.35,27.01 11.35,25.34 11.2,25.19 DMG2305UX-7.2 11.2,25.03 v11.2,24.12 | v32.84,8.73 32.08,8.73 31.77,9.03 IC2.C2 | v32.84,7.51 32.84,5.53 34.21,4.15 R7.2 | v17.75,10.25 17.44,10.56 17.44,11.17 C34.1
  Bottom 0.152: v32.84,7.51 32.84,8.57 | 19.88,8.57 18.21,10.25 v17.75,10.25 17.75,19.09 15.92,20.92 15.31,20.92 13.33,18.94 12.11,18.94 11.2,19.85 v11.2,24.12 | 32.84,8.57 19.88,8.57 | 32.84,8.57 v32.84,8.73 | 19.88,8.57 v19.88,4.31
3V3/2.4A  (via drill 0.35)  (1 unrouted)
  Top 0.152: IC3.10 19.58,10.4 v19.58,12.38 19.58,13.91 16.83,16.65 16.83,23.51 17.9,24.58 17.9,29.76 16.53,31.13 TP_3V3.TP | 24.76,19.7 24.76,18.63 U1.P$B1 | 23.54,20.92 24.76,19.7 | 23.54,20.92 24.76,22.14 24.76,23.51 C33.1 24.91,23.66 v25.83,24.58 | 23.54,20.92 C25.1 | 24.76,19.7 25.98,20.92 27.2,20.92 C14.1 | 24.76,14.21 24.91,14.21 25.22,13.91 U1.P$Y2 | 22.63,13.15 22.63,13.3 C6.1 | 22.63,13.15 22.93,12.84 23.39,12.84 23.69,13.15 | 24.76,14.21 23.69,13.15 | 24.76,14.21 U1.P$W1 | 23.69,13.15 24.15,12.69 24.15,10.25 24.3,10.1 25.22,10.1 25.37,10.25 25.37,11.47 25.22,11.62 25.22,11.93 C19.1 | 28.11,12.38 28.11,12.69 U1.P$AD14 | 28.11,12.38 27.65,11.93 C7.1 | U1.P$AD23 31.46,12.69 31.92,12.23 C8.1 | 28.11,12.38 28.42,12.38 28.57,12.23 29.94,12.23 | 29.94,12.23 30.25,12.23 U1.P$AD23 | U1.P$AD23 | 20.34,23.97 20.8,23.97 IC9.E3 | 20.34,22.59 20.34,23.97 | 20.34,23.97 IC9.E2 | 19.58,21.38 19.27,21.38 18.97,21.68 18.97,22.29 19.27,22.59 20.34,22.59 | 19.58,21.38 20.34,21.38 R18.1 | 20.34,22.59 R17.1 | 21.56,10.1 21.56,8.57 21.25,8.27 20.95,8.27 20.64,8.57 20.64,8.73 IC3.3 | 21.56,10.1 21.41,10.25 21.1,10.25 IC3.7 | U1.P$A22 30.25,19.24 30.25,19.55 30.55,19.85 C12.1 30.7,20 30.7,20.31 v31.16,20.77 | v37.87,21.38 39.7,21.38 40.61,22.29 TP_3.3V.TP | v21.86,10.1 21.56,10.1 | v19.58,21.07 19.58,21.38 | v29.94,12.08 29.94,12.23 | v21.86,13.15 22.63,13.15
  Bottom 0.152: 37.1,20.77 37.26,20.77 v37.87,21.38 | 37.1,20.77 31.46,20.77 | 30.09,12.08 34.06,16.04 34.97,16.04 37.1,18.17 37.1,20.77 | 30.09,12.08 28.11,10.1 v21.86,10.1 20.34,11.62 | v19.58,21.07 v19.58,12.38 20.34,11.62 | 30.09,12.08 v29.94,12.08 | 20.34,11.62 v21.86,13.15 | v25.83,24.58 29.33,24.58 31.46,22.44 31.46,20.77 | 31.46,20.77 v31.16,20.77
DN
  Top 0.152: 27.65,30.06 27.65,27.78 J4.A7 | 27.65,30.06 31.31,33.72 33.9,33.72 34.21,33.41 D3.1 | 27.65,30.06 27.35,30.37 24,30.37 22.78,29.15 22.78,26.56 24,25.34 26.89,25.34 28.72,27.17 28.72,27.62 J4.B7
DP
  Top 0.152: J4.B6 27.2,27.62 27.2,27.17 27.5,26.86 27.96,26.86 28.11,27.01 28.11,27.62 J4.A6 28.11,27.78 28.11,30.06 28.42,30.37 31.77,30.37 32.84,31.43 34.21,31.43 D3.3
EPD_3V3  (via drill 0.35)
  Top 0.152: J1.16 10.43,15.58 10.43,15.89 J1.15 10.59,16.04 v11.35,16.04 | v15.62,20.31 15.31,20.31 14.7,20.92 EPD_C5.2 | 2.2,29.91 2.2,31.13 L5.1 | 8.91,26.71 9.37,27.17 10.13,27.17 DMG2305UX-7.3 | 8.91,26.71 6.93,26.71 5.56,28.08 2.05,28.08 1.9,28.23 1.9,29.6 2.2,29.91 | 2.2,29.91 C1-EP-DR.1 | 8.91,26.71 v9.21,26.41
  Bottom 0.152: v15.62,20.31 12.87,17.57 | 12.87,17.57 v11.35,16.04 | 12.87,17.57 9.21,21.22 v9.21,26.41
GDR
  Top 0.152: 11.65,28.39 11.5,28.39 R2_EP_DR.2 | 11.65,28.39 12.11,28.84 12.11,29.76 12.87,30.52 Q3.1 | 11.65,28.39 11.96,28.08 11.96,23.51 10.89,22.44 10.59,22.44 J1.2
GND  (via drill 0.35)  (8 unrouted)
  Top 0.152: 17.75,16.65 18.05,16.96 18.05,17.11 C18.2 | 17.75,16.65 17.29,16.65 17.14,16.8 17.14,18.17 17.44,18.48 C17.1 17.6,18.48 17.6,23.81 18.82,25.03 | IC3.9 20.19,10.4 20.49,10.4 IC3.8 20.64,10.4 20.64,11.17 | 21.1,13.3 20.64,12.84 20.64,11.17 | 21.1,13.3 21.71,13.91 22.93,13.91 23.08,13.76 23.08,13.45 C6.2 | 21.1,13.3 17.75,16.65 | 16.53,24.12 15.31,24.12 14.7,24.73 C24.1 14.55,24.88 14.24,24.88 13.33,25.79 13.33,26.1 SJ1.1 | 16.53,24.12 16.99,24.12 17.44,24.58 17.44,25.64 16.83,26.25 16.53,26.25 R_TYPE_SEL.1 | 25.98,10.86 25.67,11.17 25.67,11.93 C19.2 | 28.26,11.62 28.26,11.77 C7.2 | 28.26,11.62 27.5,10.86 C21.2 25.98,10.86 | 23.39,9.79 23.39,10.71 22.93,11.17 | 24.3,9.49 24.3,8.88 23.08,7.66 20.04,7.66 18.66,9.03 18.66,10.25 18.05,10.86 18.05,11.17 C34.2 17.9,11.32 17.9,11.62 16.53,12.99 16.53,24.12 | 24.3,9.49 24,9.79 23.39,9.79 | 23.39,9.79 C42.2 | 22.93,11.17 23.39,11.62 23.39,12.08 C20.2 | 22.93,11.17 R3.1 22.78,11.17 20.64,11.17 | 25.98,10.86 25.98,10.4 25.06,9.49 24.3,9.49 | 24.15,5.37 23.39,6.14 22.78,6.14 22.63,5.98 22.63,5.83 C31.1 | 24.15,5.37 24.15,3.09 SW_ENT.1 | 41.98,14.52 41.37,14.52 41.22,14.67 C22.2 | 41.98,14.52 42.29,14.82 42.29,15.89 C1.2 42.29,16.04 42.29,17.11 C2.2 | 29.03,8.12 29.03,8.27 C32.1 | 29.03,8.12 29.18,7.96 29.64,7.96 30.7,9.03 | 30.7,9.03 31.31,9.64 IC2.B1 | C9.2 33.29,13.3 33.29,12.99 32.53,12.23 C8.2 32.53,12.08 32.53,11.47 | 34.06,8.12 34.06,8.42 32.84,9.64 32.68,9.64 | 34.06,8.12 34.06,6.14 | 34.06,6.14 34.06,5.83 C29.1 | 32.68,9.64 32.38,9.64 IC2.B3 | 35.58,4.61 35.58,5.22 34.97,5.83 34.97,5.98 34.82,6.14 34.06,6.14 | 35.58,4.61 35.58,3.09 SW_DN.1
  Top 0.152: 32.53,11.47 32.53,10.4 32.68,10.25 32.68,9.64 | 30.7,9.03 31.62,8.12 34.06,8.12 | 41.98,14.52 41.98,13.91 43.96,11.93 43.96,7.36 41.22,4.61 35.58,4.61 | 24.15,5.37 26.28,5.37 29.03,8.12 | 28.26,11.62 29.48,11.62 29.64,11.47 32.53,11.47 | C12.2 31.16,20 33.75,20 34.67,20.92 C13.2 34.67,21.07 34.67,21.99 | 34.67,21.99 37.41,24.73 37.41,27.32 C43.2 | D3.2 34.21,32.5 32.38,32.5 J4.SH1 | C25.2 24.91,21.07 24.91,21.83 25.98,22.9 25.98,23.51 C33.2 26.13,23.66 26.59,23.66 27.05,24.12 30.4,24.12 30.86,23.66 | 30.86,23.66 31.31,24.12 31.77,24.12 | 31.77,24.12 31.92,23.97 31.92,23.66 C16.2 32.08,23.51 33.6,21.99 34.67,21.99 | C14.2 28.72,21.07 30.7,23.05 30.7,23.51 C15.2 30.86,23.66 | 31.77,24.12 32.23,24.58 32.23,28.23 J4.SH3 | C4.2 39.7,14.67 39.7,16.19 40,16.5 X1.2 | X1.4 38.78,17.72 39.09,17.41 39.24,17.41 40,16.65 X1.2 | X1.2 40.15,16.5 40.91,17.26 40.91,18.33 39.54,19.7 38.17,19.7 TP_GND.TP 38.02,19.7 v36.49,19.7 | v22.93,17.87 22.93,18.63 23.24,18.94 23.69,18.94 24,18.63 24,18.48 C5.2 | C3.2 34.67,14.67 v34.67,16.65 34.67,18.48 C10.2 34.51,18.48 34.51,18.78 34.36,18.94 33.75,18.94 C11.2 | 26.28,17.87 26.44,18.02 26.44,18.63 U1.P$B7 | 29.79,17.72 30.09,17.41 30.7,17.41 U1.P$F23 | 26.13,15.28 26.13,14.21 U1.P$87 | 26.13,15.28 U1.P$83 | 26.13,15.28 U1.P$74 | 26.28,17.87 U1.P$75 | 26.28,17.87 U1.P$74 | 28.42,14.21 27.5,14.21 U1.P$88 | U1.P$84 27.35,15.43 27.2,15.58 U1.P$74 | 28.42,14.21 U1.P$89 | 28.42,14.21 U1.P$74 | U1.P$85 28.42,15.43 28.11,15.43 U1.P$74 | U1.P$80 27.35,16.65 U1.P$74 | U1.P$81 28.57,16.5 U1.P$74 | 29.79,15.28 29.79,14.21 U1.P$90 | 29.79,15.28 U1.P$86 | 29.79,15.28 U1.P$74
  Top 0.152: 29.18,17.11 29.64,16.65 U1.P$82 | 26.89,17.26 27.35,17.72 U1.P$76 | 29.18,17.11 28.57,17.72 U1.P$77 | 29.18,17.11 U1.P$74 | 29.79,17.72 U1.P$78 | 29.79,17.72 U1.P$74 | 26.89,17.26 26.28,16.65 U1.P$79 | 26.89,17.26 U1.P$74 | C1-EP-DR.2 3.27,29.91 4.49,31.13 4.49,32.35 D4.1 4.64,32.5 6.78,32.5 7.39,33.11 8.91,33.11 9.52,32.5 | 10.43,29.91 11.35,29 R2_EP_DR.1 | 10.43,29.91 TP_BAT_GND.TP 10.28,29.91 | 9.52,32.5 9.37,32.5 C23.2 | 9.52,32.5 9.82,32.2 9.82,31.89 9.98,31.74 10.43,31.74 U3.4 | 11.5,31.74 11.96,31.28 13.33,31.28 13.63,30.98 v14.55,30.98 15.16,30.98 C38.1 | 11.5,32.2 11.5,32.35 U3.9 | 11.5,32.2 11.5,31.74 | U3.1 10.59,33.11 10.89,33.11 11.5,32.5 U3.9 | 11.5,32.2 12.41,32.2 U3.6 | 11.5,32.2 U3.9 | 11.5,31.74 10.59,31.74 U3.4 | 10.43,29.91 10.43,31.59 U3.4 | 13.33,19.7 13.18,19.55 v12.41,19.55 10.59,19.55 J1.8 | 13.33,19.7 EPD_C7.1 | 13.33,19.7 EPD_C6.1 13.33,19.85 13.33,20.92 EPD_C5.1 | EPD_C12.1 13.33,12.23 13.33,13.3 EPD_C11.1 13.33,13.45 EPD_C10.1 | 12.87,15.13 11.35,15.13 11.2,14.97 10.59,14.97 J1.17 | EPD_C10.1 12.87,15.13 | EPD_C10.1 | 12.87,15.13 13.33,15.58 13.33,15.89 EPD_C9.1 13.33,16.04 13.33,17.11 EPD_C8.1 13.33,17.26 EPD_C7.1 | EPD_C7.1 | R2_USB.2 24.15,25.95 23.84,25.95 23.69,26.1 23.69,28.23 J4.SH4 | 20.34,24.88 20.04,24.88 IC9.C1 19.88,24.88 19.88,25.03 | 19.88,25.03 19.88,25.19 IC9.B1 | 20.34,24.88 20.64,24.88 IC9.C3 | 20.34,24.88 IC9.C2 | IC1.D2 19.27,31.89 20.64,31.89 21.56,32.81 R9.1 21.71,32.81 22.02,32.5 | 18.21,31.28 18.36,31.13 21.25,31.13 22.02,31.89 22.02,32.5 | 18.21,31.28 16.99,32.5 16.83,32.5 C39.2 | 18.82,25.03 18.51,25.03 18.21,25.34 18.21,31.28 | 18.82,25.03 19.88,25.03
  Top 0.152: 22.02,32.5 23.54,32.5 J4.SH2
  Bottom 0.152: J4.SH3 32.38,28.39 32.38,32.35 J4.SH1 32.23,32.5 23.69,32.5 J4.SH2 | v22.93,17.87 22.93,16.96 23.69,16.19 25.83,16.19 26.13,16.5 U1.P$79 | U1.P$82 29.79,16.65 v34.67,16.65 36.49,18.48 v36.49,19.7 | R1_USB.1 22.93,25.95 23.08,25.95 23.54,26.41 23.54,28.23 J4.SH4 23.54,28.39 23.54,32.35 J4.SH2 | v12.41,19.55 13.48,19.55 15.77,21.83 15.92,21.83 19.88,25.79 22.78,25.79 R1_USB.1 | v14.55,30.98 15.62,30.98 17.9,33.26 22.78,33.26 23.54,32.5 J4.SH2 | U1.P$75 26.13,17.87 26.13,22.59 22.93,25.79 R1_USB.1
JJ  (via drill 0.35)
  Top 0.152: U1.P$E24 31.16,17.72 v31.92,17.72 33.29,17.72 C10.1 | 29.48,23.66 28.57,23.66 L3.2 | 29.48,23.66 30.25,23.66 C15.1 | U1.P$B5 25.98,18.78 26.28,19.09 26.28,19.24 27.05,20 28.72,20 v30.86,22.14 31.46,22.75 31.46,23.51 C16.1 | v29.48,23.51 29.48,23.66
  Bottom 0.152: v29.48,23.51 v30.86,22.14 30.55,21.83 30.55,20.46 31.92,19.09 v31.92,17.72
LX1  (1 unrouted)
  Top 0.152: IC9.B3 20.8,25.19 21.1,25.49 21.1,25.95 19.43,27.62 19.43,28.54 L7.1
LX2
  Top 0.152: IC9.D2 20.64,24.42 IC9.D3 20.8,24.42 20.95,24.42 21.41,24.88 21.41,26.1 20.95,26.56 20.95,28.23 21.25,28.54 L7.2
N$1
  Top 0.152: IC1.D1 18.82,31.89 18.82,31.74 19.12,31.43 20.8,31.43 21.56,32.2 R9.2
N$2  (via drill 0.35)
  Top 0.152: v19.27,24.27 19.43,24.42 19.88,24.42 IC9.D1 | v23.69,24.12 23.39,24.12 22.93,24.58 R4.2
  Bottom 0.152: v19.27,24.27 23.54,24.27 v23.69,24.12
N$3
  Top 0.152: IC9.E1 19.88,23.97 19.88,23.66 18.66,22.44 18.66,20.92 21.1,18.48 22.17,18.48 22.93,19.24 22.93,20.46 22.78,20.61 22.78,21.83 22.93,21.99 22.93,23.2 R2.2
N$4
  Top 0.152: IC3.1 19.58,8.73 19.58,8.57 20.19,7.96 21.41,7.96 22.47,9.03 22.47,10.25 22.78,10.56 R3.2
N$5  (1 unrouted)
N$6
  Top 0.152: U1.P$F2 25.22,17.41 25.06,17.41 24.91,17.57 23.69,17.57 22.17,16.04 20.19,16.04 19.12,17.11 X2.1 18.97,17.26 18.51,17.72 17.75,17.72 17.6,17.57 17.6,17.26 C18.1
N$7  (1 unrouted)
  Top 0.152: C17.2 20.34,18.48 21.56,17.26 X2.2
N$8
  Top 0.152: U1.P$C1 24.76,18.17 24.46,18.17 24.15,17.87 23.84,17.87 23.39,18.33 C5.1
N$9
  Top 0.152: U1.P$N24 31.16,15.74 32.23,15.74 32.68,15.28 32.68,13.45 C9.1
N$10
  Top 0.152: U1.P$B3 25.52,18.63 25.52,18.94 26.89,20.31 27.81,20.31 27.96,20.46 27.96,21.83 27.5,22.29 L2.1
N$11
  Top 0.152: L2.2 28.42,22.29 28.42,22.59 27.5,23.51 L3.1
N$12
  Top 0.152: C3.1 31.62,17.11 31.16,17.11 31.01,16.96 30.7,16.96 U1.P$H23 | L1.1 35.28,14.67 34.82,14.21 34.21,14.21 34.06,14.36 C3.1 | C3.1
N$13  (via drill 0.35)
  Top 0.152: L1.2 38.17,14.67 | 38.17,14.67 C4.1 | 40.46,15.58 40.46,15.74 41.22,16.5 41.22,19.85 ANT1.1 | 40.46,15.58 40.46,14.67 C22.1 | v38.17,15.28 38.17,14.67 | 40.46,15.58 v40.3,15.58
  Bottom 0.152: v38.17,15.28 38.48,15.58 38.48,15.74 38.78,16.04 39.85,16.04 v40.3,15.58
N$14
  Top 0.152: U1.P$D23 30.7,18.02 31.01,18.02 31.31,18.33 32.53,18.33 32.68,18.48 C11.1
N$15
  Top 0.152: 35.73,19.55 32.68,19.55 32.38,19.24 30.7,19.24 U1.P$A23 | 35.73,19.55 36.8,18.48 39.39,18.48 40,17.87 X1.3 | 35.73,19.55 35.73,20.16 38.48,22.9 38.48,24.42 40.15,26.1 41.22,26.1 42.13,25.19 42.13,18.94 41.68,18.48 41.68,17.26 C2.1
N$16  (via drill 0.35)
  Top 0.152: U1.P$B24 31.16,18.63 32.23,18.63 32.84,19.24 35.58,19.24 38.17,16.65 38.63,16.65 X1.1 38.78,16.5 39.09,16.19 v39.09,15.43 | v41.68,15.13 41.68,15.89 C1.1
  Bottom 0.152: v41.68,15.13 40.76,15.13 40.61,14.97 39.54,14.97 v39.09,15.43
N$17  (via drill 0.35)
  Top 0.152: 3.88,28.54 6.93,28.54 8,27.47 D5.2 | 3.88,28.54 2.81,28.54 C2-EP-DR.2 | v3.88,31.43 3.73,31.28 3.12,31.28 L5.2 | 3.88,28.54 v3.88,28.84 | v13.48,28.39 15.01,29.91 Q3.3
  Bottom 0.152: v3.88,31.43 v3.88,28.84 4.49,28.23 7.84,28.23 8,28.39 v13.48,28.39
N$18
  Top 0.152: C2-EP-DR.1 2.36,28.69 2.36,29 2.81,29.45 4.03,29.45 4.49,29.91 D2.1 4.64,29.91 7.08,32.35 8,32.35 D4.2
N$20
  Top 0.152: 14.85,26.1 15.01,25.95 16.53,25.95 R_TYPE_SEL.2 | 14.85,26.1 14.85,27.32 15.16,27.62 R1_EP_DR.1 | 14.85,26.1 SJ1.2
N$22
  Top 0.152: U1.P$A18 29.18,19.24 29.18,19.7 30.86,21.38 33.75,21.38 34.06,21.07 C13.1
N$23
  Top 0.152: C32.2 29.48,8.42 29.48,8.88 31.16,10.56 31.31,10.56 IC2.A2
N$24
  Top 0.152: J1.4 10.59,21.53 10.89,21.53 12.72,23.36 12.72,24.12 12.87,24.27 13.94,24.27 14.55,23.66 EPD_C2.2
N$25  (via drill 0.35)
  Top 0.152: v11.81,21.07 10.59,21.07 J1.5 | v15.62,22.44 14.85,22.44 14.7,22.29 EPD_C1.2
  Bottom 0.152: v11.81,21.07 14.24,21.07 v15.62,22.44
N$28  (via drill 0.35)
  Top 0.152: v11.65,14.52 10.59,14.52 J1.18 | v15.62,18.48 15.62,18.78 14.7,19.7 EPD_C6.2
  Bottom 0.152: v15.62,18.48 v11.65,14.52
N$29  (via drill 0.35)
  Top 0.152: v12.41,13.91 10.59,13.91 J1.19 | v15.62,17.11 15.62,17.57 14.7,18.48 EPD_C7.2
  Bottom 0.152: v15.62,17.11 v12.41,13.91
N$30
  Top 0.152: J1.20 10.59,13.45 10.89,13.45 13.03,11.32 13.79,11.32 13.94,11.47 13.94,16.5 14.55,17.11 EPD_C8.2
N$31  (via drill 0.35)
  Top 0.152: v28.72,29.76 28.72,28.84 29.18,28.39 29.18,27.78 J4.A5
  Route15 0.152: v22.93,30.22 24.61,30.22 24.76,30.37 28.11,30.37 v28.72,29.76
  Bottom 0.152: v22.93,30.22 22.78,30.06 22.78,26.41 R1_USB.2
N$32
  Top 0.152: J1.22 10.43,12.38 9.21,12.38 8.91,12.08 8.91,11.47 9.98,10.4 14.55,10.4 15.62,11.47 15.62,13.76 14.7,14.67 EPD_C10.2
N$33
  Top 0.152: C31.2 23.08,5.68 23.08,4.92 22.93,4.76 R8.1
N$34
  Top 0.152: J1.24 10.59,11.32 12.57,11.32 12.87,11.01 13.94,11.01 14.55,11.62 14.55,12.08 EPD_C12.2
N$35
  Top 0.152: R2_USB.1 24.15,26.41 25.52,26.41 26.13,27.01 26.13,27.62 J4.B5
N$36
  Top 0.152: C29.2 34.51,5.68 34.51,4.92 34.36,4.76 R7.1
OUT+
  Top 0.152: IC2.A3 32.23,10.1 32.23,10.25 31.62,10.86 27.96,10.86 24.46,7.36 3.58,7.36 2.66,8.27 TP_OP.TP
P0.13/1.5D  (2 unrouted)
P1.01/1.6C
  Top 0.152: R_PWR_EPD.1 11.35,27.62 10.89,27.17 10.89,26.71 9.37,25.19 DMG2305UX-7.1
PMIC_INT  (1 unrouted)
PREVGH
  Top 0.152: 9.21,12.84 10.43,12.84 J1.21 | 9.21,12.84 8.61,12.23 8.61,11.32 9.82,10.1 14.7,10.1 15.92,11.32 15.92,14.67 14.7,15.89 EPD_C9.2 | 9.21,12.84 9.21,23.36 8.45,24.12 8.45,24.73 5.86,27.32 4.64,27.32 D5.1
PREVGL  (via drill 0.35)
  Top 0.152: 9.82,11.77 9.98,11.93 10.43,11.93 J1.23 | 9.82,11.77 9.82,11.17 10.28,10.71 14.4,10.71 15.31,11.62 15.31,12.69 14.7,13.3 EPD_C11.2 | v7.54,28.84 8,29.3 8,29.91 D2.2 | 9.82,11.77 v9.52,11.77
  Route15 0.152: v7.54,28.84 7.54,25.64 9.52,23.66 v9.52,11.77
RESE  (via drill 0.35)
  Top 0.152: v16.07,27.17 15.31,27.17 R1_EP_DR.2 | v13.94,29.91 13.63,29.91 13.03,29.3 Q3.2 12.87,29.15 12.41,28.69 12.41,23.51 10.89,21.99 10.59,21.99 J1.3
  Bottom 0.152: v16.07,27.17 16.07,28.54 14.7,29.91 v13.94,29.91
RESET  (2 unrouted)
SCL/1.4C  (1 unrouted)
SCL/2.4C  (via drill 0.35)  (1 unrouted)
  Top 0.152: v18.21,32.2 18.66,32.65 18.82,32.65 IC1.B1 | v21.56,26.86 21.56,26.41 22.78,25.19 R4.1 22.78,25.03 22.63,25.03 21.71,24.12 21.71,22.29 TP_SCL.TP 20.8,22.29 20.64,22.14 20.34,22.14 R17.2 20.34,21.99 v19.58,21.99 | v18.97,10.86 18.97,9.64 19.27,9.34 19.43,9.34 IC3.12
  Bottom 0.152: v18.21,32.2 18.21,30.22 v21.56,26.86 | v18.97,10.86 18.97,21.38 v19.58,21.99
SDA/1.4C  (1 unrouted)
SDA/2.4C  (via drill 0.35)  (2 unrouted)
  Top 0.152: v24,16.8 24.61,16.19 24.76,16.19 U1.P$L1 | v24,22.29 24,22.9 23.08,23.81 22.93,23.81 R2.1 | v20.34,9.64 20.19,9.49 20.19,8.88 IC3.2 | R18.2 20.34,20.77 20.64,20.77 21.56,19.85 TP_SDA.TP
  Bottom 0.152: v24,16.8 v24,22.29 23.69,22.59 19.27,22.59 18.36,21.68 18.36,10.56 19.27,9.64 v20.34,9.64
SWDCLK  (via drill 0.35)  (1 unrouted)
  Top 0.152: v31.92,15.13 31.92,14.36 31.31,13.76 31.16,13.76 U1.P$AA24 | v34.82,20.16 38.17,23.51 38.17,24.88 TP_SWDCLK.TP
  Route15 0.152: v31.92,15.13 31.92,16.8 34.82,19.7 v34.82,20.16
SWDIO  (via drill 0.35)  (1 unrouted)
  Top 0.152: v32.08,13.15 31.16,13.15 U1.P$AC24 | v35.43,21.68 35.43,22.29 37.87,24.73 37.87,26.56 40.61,29.3 40.61,29.91 TP_SWDIO.TP
  Route15 0.152: v32.08,13.15 32.08,14.36 34.06,16.35 34.06,18.48 35.43,19.85 v35.43,21.68
SWO  (1 unrouted)
VBAT/1.2A
  Top 0.152: U3.3 10.43,32.2 10.43,32.65 U3.2 10.43,32.81 9.98,32.81 9.82,32.96 9.82,33.41 9.98,33.57 13.18,33.57 13.48,33.26 13.94,33.26 | 13.94,33.26 13.94,32.5 TP_VBAT.TP 13.94,33.26 | 13.94,33.26 13.94,33.72 C27.2
VBAT/2.5C  (1 unrouted)
VBUS/1.5D  (via drill 0.35)  (2 unrouted)
  Top 0.152: v23.69,9.18 23.24,9.18 22.93,9.49 22.93,9.79 C42.1 | v36.34,25.95 36.34,27.32 C43.1 36.19,27.47 35.89,27.78 35.89,31.89 36.34,32.35 36.8,32.35 D3.5
  Bottom 0.152: v23.69,9.18 29.03,9.18 38.48,18.63 38.48,23.81 v36.34,25.95
VBUS/2.6D  (via drill 0.35)  (1 unrouted)
  Top 0.152: U1.P$AD2 24.76,12.23 C21.1 | v15.46,32.96 15.46,32.35 15.16,32.04 15.16,31.43 C38.2 | v24.61,13.15 25.06,12.69 U1.P$AD2 | U1.P$AD2
  Route15 0.152: v15.46,32.96 15.46,23.51 24.61,14.36 v24.61,13.15
VLAD
  pour Route2: -2.44,-5.57 50.79,-5.57 52.01,-4.35 52.01,34.96 50.79,36.18 -2.44,36.18
VREG  (via drill 0.35)
  Top 0.152: 19.73,32.96 19.43,32.65 IC1.B2 | 19.73,32.96 19.73,33.11 19.43,33.41 16.99,33.41 16.38,32.81 16.38,32.5 C39.1 | 20.34,25.64 20.04,25.64 IC9.A1 19.88,25.64 v18.82,25.64 | 20.34,25.64 20.64,25.64 IC9.A3 | 20.34,25.64 IC9.A2 | v9.37,31.43 9.37,32.04 C23.1 | v14.85,28.84 16.38,28.84 16.53,28.69 TP_VREG.TP | v16.83,24.88 15.92,24.88 C24.2 | v20.04,32.65 19.73,32.96
  Bottom 0.152: v9.37,31.43 11.5,31.43 14.09,28.84 v14.85,28.84 14.85,27.47 16.68,25.64 16.83,25.64 | 16.83,25.64 17.6,25.64 | 17.6,25.64 v18.82,25.64 | 16.83,25.64 v16.83,24.88 | v20.04,32.65 18.66,32.65 18.51,32.81 17.9,32.81 17.6,32.5 17.6,25.64